# EAGLE board i12_TEMPERATURESENSOR-v03(3_4) (EAGLE 6.5.0)
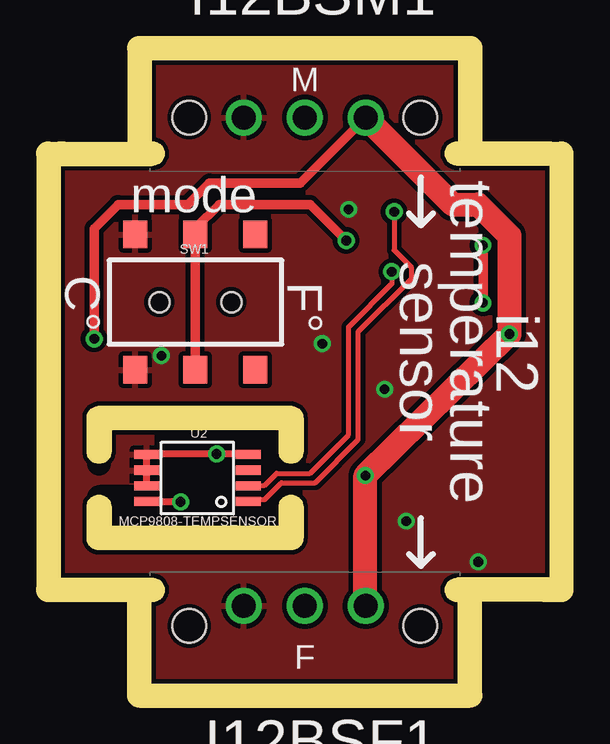
[diagram p0: board, top side]
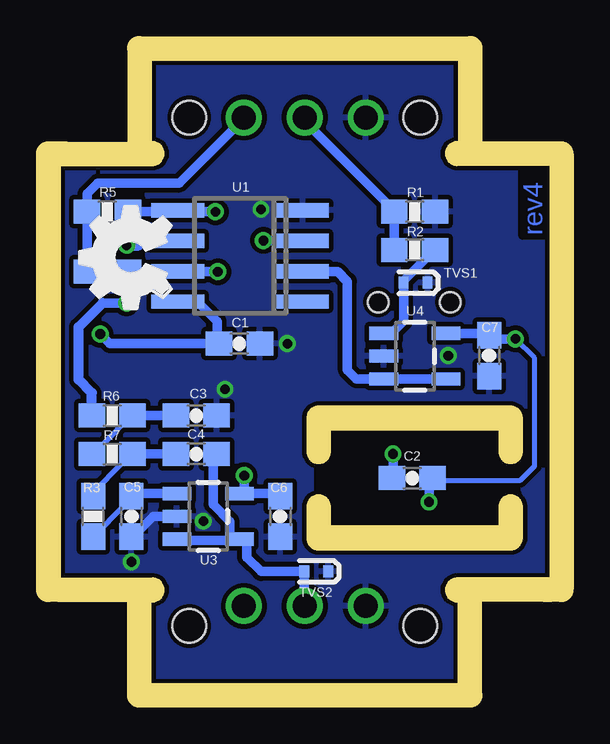
[diagram p1: board, bottom side, seen from below]

Size 20.4 x 26 mm. Coordinates in mm from the lower left corner, seen from the top.
Outline: 20.4,21.6 20.4,4.4
Outline: 0,21.6 0,4.4
Outline: 2.12,9.67 arc-180 1.12,9.67 1.12,11.07 arc-90 1.62,11.57 9.62,11.57 arc-90 10.12,11.07 10.12,9.67 arc-180 9.12,9.67 9.12,10.57 2.12,10.57 2.12,9.67
Outline: 2.12,7.37 2.12,6.57 9.12,6.57 9.12,7.37 arc-180 10.12,7.37 10.12,6.07 arc-90 9.62,5.57 1.62,5.57 arc-90 1.12,6.07 1.12,7.37 arc-180 2.12,7.37
Copper layers (1*16): Top 0.035mm / dielectric 1.5mm / Bottom 0.035mm
Design rules "littleBitsDRC": minimum track width 0.2mm, minimum drill 0.4mm, track to track 0.2mm, track to pad 0.2mm, pad to pad 0.2mm, via to via 0.2mm, smd to smd 0mil, copper to edge 0.2mm, drill to drill 0.2mm, minimum pad ring 0.2mm, minimum via ring 0.15mm, stop-mask expansion 0.1mm, vias tented up to drill 0mil, thermal gap 0.2mm
tRestrict: area 1.6,6.1 to 9.6,11.1; 6 lines
bRestrict: area 1.5,6 to 9.6,10.8; 6 lines
Milling: 12 lines

## Footprints (pad centres in the part's own frame; a part is rotated, then mirrored left to right if it is on the bottom)
BITSNAP_V03_FEMALE = drill 1: GND 4.065,3.44; SIG 6.605,3.44; VCC 9.145,3.44 | hole 1.4: 1.785,2.61; 11.425,2.61
BITSNAP_V03_MALE = drill 1: GND1 9.145,2.61; SIG1 6.605,2.61; VCC1 4.065,2.61 | hole 1.4: 1.785,2.61; 11.425,2.61
CAP-0603 = smd 1.1 x 1: 1 -0.85,0; 2 0.85,0
RES-0603 = smd 1.1 x 1: 1 -0.85,0; 2 0.85,0
AYZ0202 = smd 1 x 1.15: 1 -2.5,2.825; 2 0,2.825; 3 2.5,2.825; 4 -2.5,-2.825; 5 0,-2.825; 6 2.5,-2.825 | hole 0.85: 1.5,0; -1.5,0
SOD-923 = smd 0.4 x 0.5: 1 -0.5,0; 2 0.5,0
SOIC08_JEDEC_150MIL = smd 0.6 x 2.2: 1 -1.905,-2.6; 2 -0.635,-2.6; 3 0.635,-2.6; 4 1.905,-2.6; 5 1.905,2.6; 6 0.635,2.6; 7 -0.635,2.6; 8 -1.905,2.6
MICRO8-ON = smd 0.38 x 1.04: 1 -0.975,-2.12; 2 -0.325,-2.12; 3 0.325,-2.12; 4 0.975,-2.12; 5 0.975,2.12; 6 0.325,2.12; 7 -0.325,2.12; 8 -0.975,2.12
SOT23-5 = smd 0.55 x 1.2: 1 -0.95,-1.3; 2 0,-1.3; 3 0.95,-1.3; 4 0.95,1.3; 5 -0.95,1.3

## Placement (x,y rotation side)
BSF1  BITSNAP_V03_FEMALE  [BITSNAP_V03_FEMALE]  3.6,-0.21 0 top
BSM1  BITSNAP_V03_MALE  [BITSNAP_V03_MALE]  16.8,26.21 180 top
C1  0.1uF  [CAP-0603]  12.93,14.17 0 bottom
C2  10uF  [CAP-0603]  5.73,8.57 180 bottom
C3  0.47uF  [CAP-0603]  14.72,11.17 0 bottom
C4  .022uF  [CAP-0603]  14.72,9.57 0 bottom
C5  4700pF  [CAP-0603]  17.42,6.97 270 bottom
C6  0.1uF  [CAP-0603]  11.22,6.97 270 bottom
C7  0.1uF  [CAP-0603]  2.52,13.67 270 bottom
DRILEGEND  [DRILEGEND]  -12.29,-27.2 0 top  (outside the outline)
R1  1M  [RES-0603]  5.62,19.67 0 bottom
R2  10k  [RES-0603]  5.62,18.07 0 bottom
R3  220k  [RES-0603]  19.02,6.97 90 bottom
R4  4.7k  [RES-0603]  18.42,17.17 0 bottom
R5  4.7k  [RES-0603]  18.42,19.67 0 bottom
R6  4.7k  [RES-0603]  18.22,11.17 180 bottom
R7  220k  [RES-0603]  18.22,9.57 180 bottom
SW1  AYZ0202  [AYZ0202]  5.65,15.9 0 top
TVS1  ESD9B5.0ST5G  [SOD-923]  5.58,16.71 180 bottom
TVS2  ESD9B5.0ST5G  [SOD-923]  9.72,4.67 180 bottom
U1  ATTINY25-SS  [SOIC08_JEDEC_150MIL]  12.89,17.83 90 bottom
U2  MCP9808-TEMPSENSOR  [MICRO8-ON]  5.73,8.57 90 top
U3  LV321SOT23-5  [SOT23-5]  14.22,6.97 270 bottom
U4  LV321SOT23-5  [SOT23-5]  5.62,13.65 270 bottom
U$4  OSHWCREDIT  [OSHWCREDIT]  -92.39,-61.75 0 top  (outside the outline)
U$5  OSHW-LOGOL  [OSHW-LOGO-L]  -27.42,-70.83 0 top  (outside the outline)
U$32  [OSHW_FILLX150_NOTEXT]  15.77,15.64 90 bottom
U$33  FRAME-LETTER-OHWOHW  [FABDWG01-OHW]  -0.47,0.17 0 top

## Library data of the parts
BSF1 BSM1 = bitSnap
C1-C7 R1-R7 SW1 U1-U4 U$4 U$5 U$33 = LITTLEBITS
DRILEGEND = drilegend
TVS1 TVS2 = LITTLEBITS; IEC_ESD_PROT: +/-18kV; LB_PN: ?; V_CLAMP: ?; V_OPERATION: 5V
U$32 = ohw-logo

## Nets
GND: BSF1.GND BSM1.GND1 C1.2 C2.2 C3.2 C5.2 C6.2 C7.2 R1.2 SW1.1 SW1.4 TVS1.1 TVS2.1 U1.4 U2.4 U2.5 U2.6 U2.7 U3.2 U4.2
N$1: R6.2 U1.6
N$2: SW1.2 SW1.5 U1.3
N$3: C3.1 R6.1 R7.2
N$4: R2.2 TVS1.2 U4.1
N$6: BSM1.SIG1 R1.1 R2.1
N$8: C4.1 R3.2 R7.1
N$9: C5.1 R3.1 U3.1
N$10: R5.2 U1.5 U2.1
N$11: R4.2 U1.7 U2.2
N$14: BSF1.SIG C4.2 TVS2.2 U3.3 U3.4
SIG: U1.2 U4.3 U4.4
VCC: BSF1.VCC BSM1.VCC1 C1.1 C2.1 C6.1 C7.1 R4.1 R5.1 U1.8 U2.8 U3.5 U4.5

## Tracks (layer width: path | path; a pad name or v marks a point on that pad's centre or on a via)
GND  (via drill 0.41)
  Top 0.2: U2.4 7.72,9.57
  Top 0.3: U2.7 U2.6 U2.5 3.62,9.57 v6.53,9.57 7.72,9.57
  Bottom 0.4: 6.53,8.62 v6.53,9.57 | C5.2 17.17,6.37 17.12,6.37 16.52,6.97 U3.2
  Bottom 0.406: C2.2 6.53,8.62
  other vias: 17.42,5.07 10.93,14.17 13.53,12.27 4.23,13.67 12.03,19.77 14.43,6.77
  pour Top: -0.47,26.17 -0.47,-0.33 20.52,-0.33 20.52,26.17
  pour Bottom: -0.47,26.17 -0.47,-0.33 20.52,-0.33 20.52,26.17
N$1  (via drill 0.41)
  Top 0.4: v17.62,15.87 v17.62,18.27
  Bottom 0.4: 18.62,15.87 v17.62,15.87 | 16.92,18.47 U1.6
  Bottom 0.406: R6.2 19.07,12.12 19.62,12.67 19.62,14.87 18.62,15.87 | v17.62,18.27 17.11,18.27 16.92,18.47
N$2  (via drill 0.41)
  Top 0.4: SW1.5 SW1.2 | v11.93,18.47 10.43,19.97 6.62,19.97 5.65,18.99
  Top 0.406: 5.65,18.99 SW1.2
  Bottom 0.4: v11.93,18.47 U1.3
  Bottom 0.406: U1.3
N$3
  Bottom 0.2: R7.2 18.67,9.97 18.62,9.97 17.42,11.17 R6.1
  Bottom 0.4: C3.1 R6.1 17.22,11.17 17.52,10.87
N$4
  Bottom 0.4: U4.1 6.53,14.6 6.53,14.67 6.08,15.11 TVS1.2 6.08,16.81 5.12,17.77 5.08,17.77 R2.2
N$6
  Bottom 0.4: R2.1 R1.1 6.48,19.72 9.83,23.07 9.83,23.23 BSM1.SIG1
N$8
  Bottom 0.2: R7.1 17.77,9.17 17.82,9.17 19.02,7.97 R3.2
  Bottom 0.4: C4.1 R7.1
N$9
  Bottom 0.2: 17.42,7.77 17.72,7.47 17.72,7.42 R3.1
  Bottom 0.4: U3.1 17.32,7.92 arc-90 C5.1 17.42,7.77
N$10  (via drill 0.41)
  Top 0.2: 8.12,7.67 8.53,7.67 9.22,8.37 10.62,8.37 12.43,10.17 12.43,14.67 14.62,16.87 14.62,17.37 13.93,18.07 v13.93,19.67
  Top 0.204: U2.1 8.12,7.67
  Bottom 0.4: R5.2 15.5,19.67 | 15.46,19.67 v13.93,19.67
  Bottom 0.406: 15.5,19.67 U1.5 15.46,19.67
N$11  (via drill 0.41)
  Top 0.2: 8.03,8.27 8.53,8.27 9.03,8.77 10.43,8.77 12.03,10.37 12.03,14.87 13.83,16.67 v13.83,17.17
  Top 0.204: U2.2 8.03,8.27
  Bottom 0.4: R4.2 15.5,17.17 | U1.7 15.03,17.17 v13.83,17.17
  Bottom 0.406: 15.5,17.17 U1.7
N$14
  Bottom 0.4: C4.2 14.08,9.27 14.03,9.07 14.03,7.47 13.33,6.77 13.33,6.02 U3.4 | BSF1.SIG 10.22,3.23 TVS2.2 12.03,4.67 12.62,5.27 12.62,6.02 U3.4 | U3.3 15.53,5.97 13.08,5.97 U3.4
SIG
  Bottom 0.4: U4.4 U4.3 8.05,12.7 8.43,13.07 8.43,16.77 8.83,17.17 10.27,17.17
  Bottom 0.406: 10.27,17.17 U1.2
VCC  (via drill 0.41)
  Top 0.2: 3.55,7.57 U2.8 | BSF1.VCC 12.72,3.25
  Top 0.3: v5.03,7.57 3.55,7.57
  Top 0.4: BSM1.VCC1 10.01,20.87 6.23,20.87 5.33,19.97 2.42,19.97 1.42,18.97 v1.42,14.37
  Top 1: BSM1.VCC1 16.37,19.97 17.42,19.97 18.72,18.67 v18.72,14.57 v12.72,8.67 12.72,3.25
  Bottom 0.2: 4.58,8.47 1.23,8.47 0.63,9.07 0.63,13.57 v1.42,14.37
  Bottom 0.4: R4.1 R5.1 19.27,20.42 18.82,20.87 15.43,20.87 12.93,23.37 BSM1.VCC1 | U1.8 15.44,15.87 14.62,15.87 13.86,15.1 13.86,14.3 13.83,14.27 C1.1 arc-90 14.08,14.47 13.93,14.17 18.32,14.17 v18.72,14.57 | 5.03,8.52 v5.03,7.57 | C2.1 4.58,8.47 | v1.42,14.37 2.42,14.37 2.42,14.52 C7.1 2.52,14.6 U4.5 | U3.5 11.53,7.92 arc90 C6.1 | 13.12,7.87 U3.5 | v12.72,8.67 12.72,7.92 U3.5
  Bottom 0.406: C2.1 5.03,8.52

## Text on the board
Bottom: rev4
tPlace: temperature | mode | C° | F° | sensor | i12
tNames: I12BSM1 | I12BSF1
Milling: 1MM ROUTER PATH
dxf: 4 | Temperature Sensor
DrillLegend: LAYER-STACK
DrillLegend_01-16: 01-16
DrillLegend_01-20: 01-20